# Altium PCB LiPoBattery.PcbDoc
Units mil, origin at the board's own origin, x right, y up, seen from the top; angles counter-clockwise.
Board outline 940 x 905 mil, 2 copper layers (Top Layer, Bottom Layer); 16 components, 13 nets, 65 pads, 8 vias.
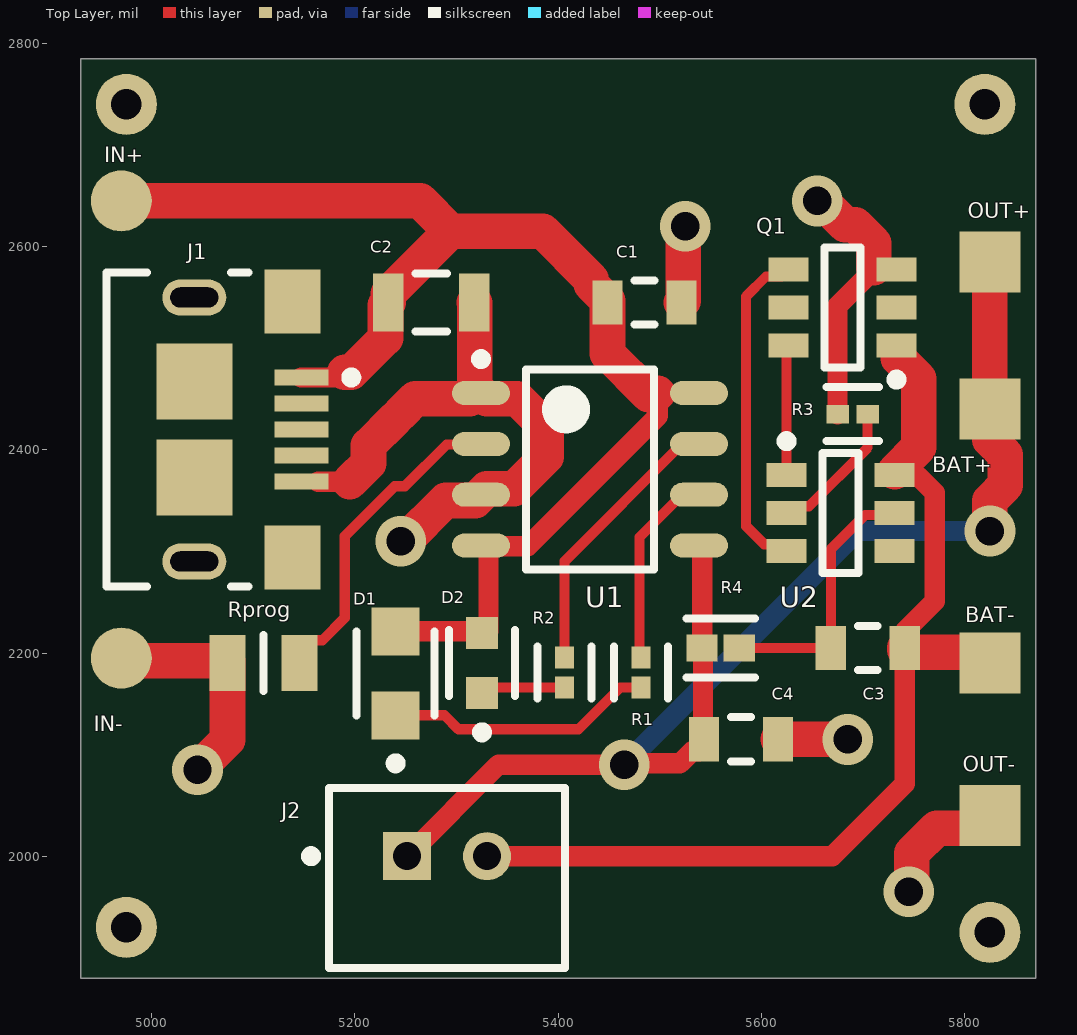
[diagram p0: Top Layer view]
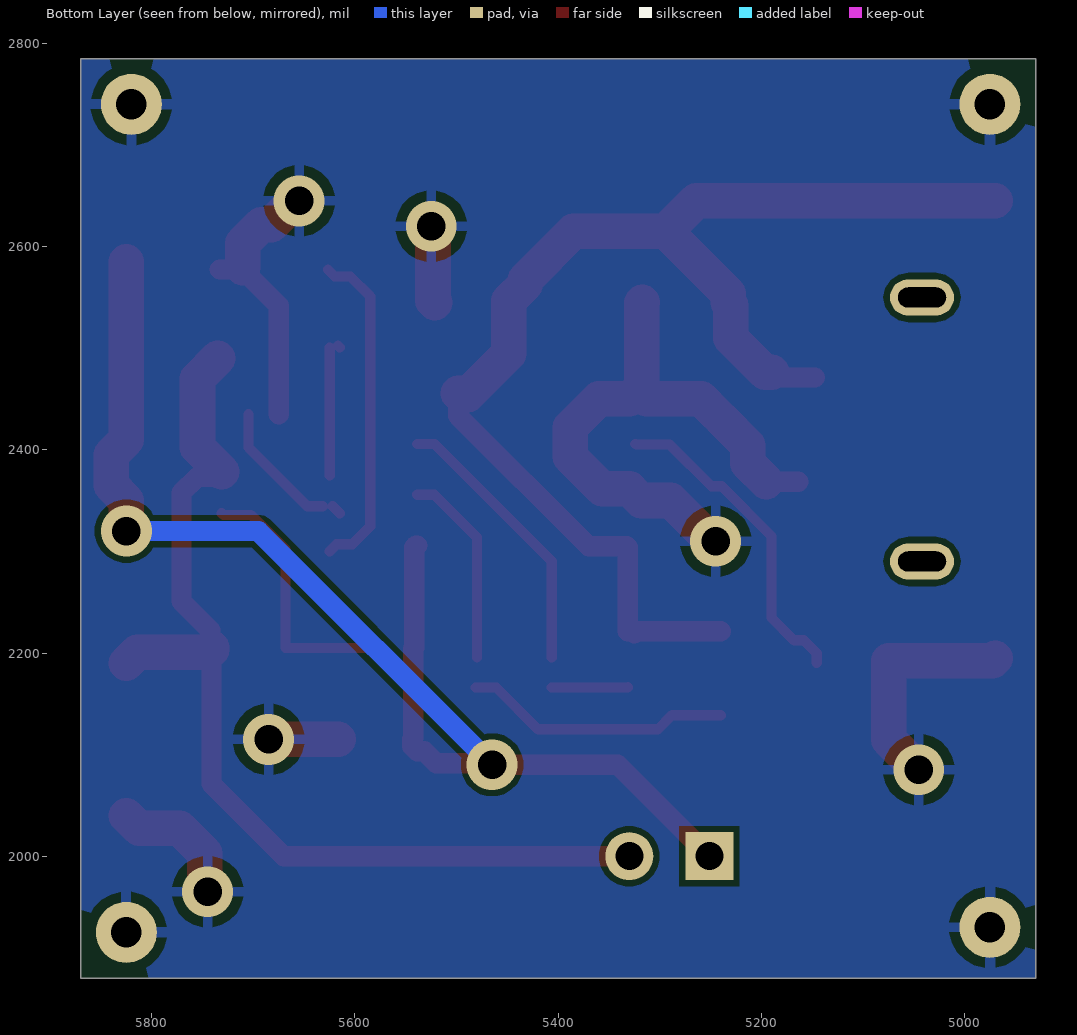
[diagram p1: Bottom Layer view, seen from below]
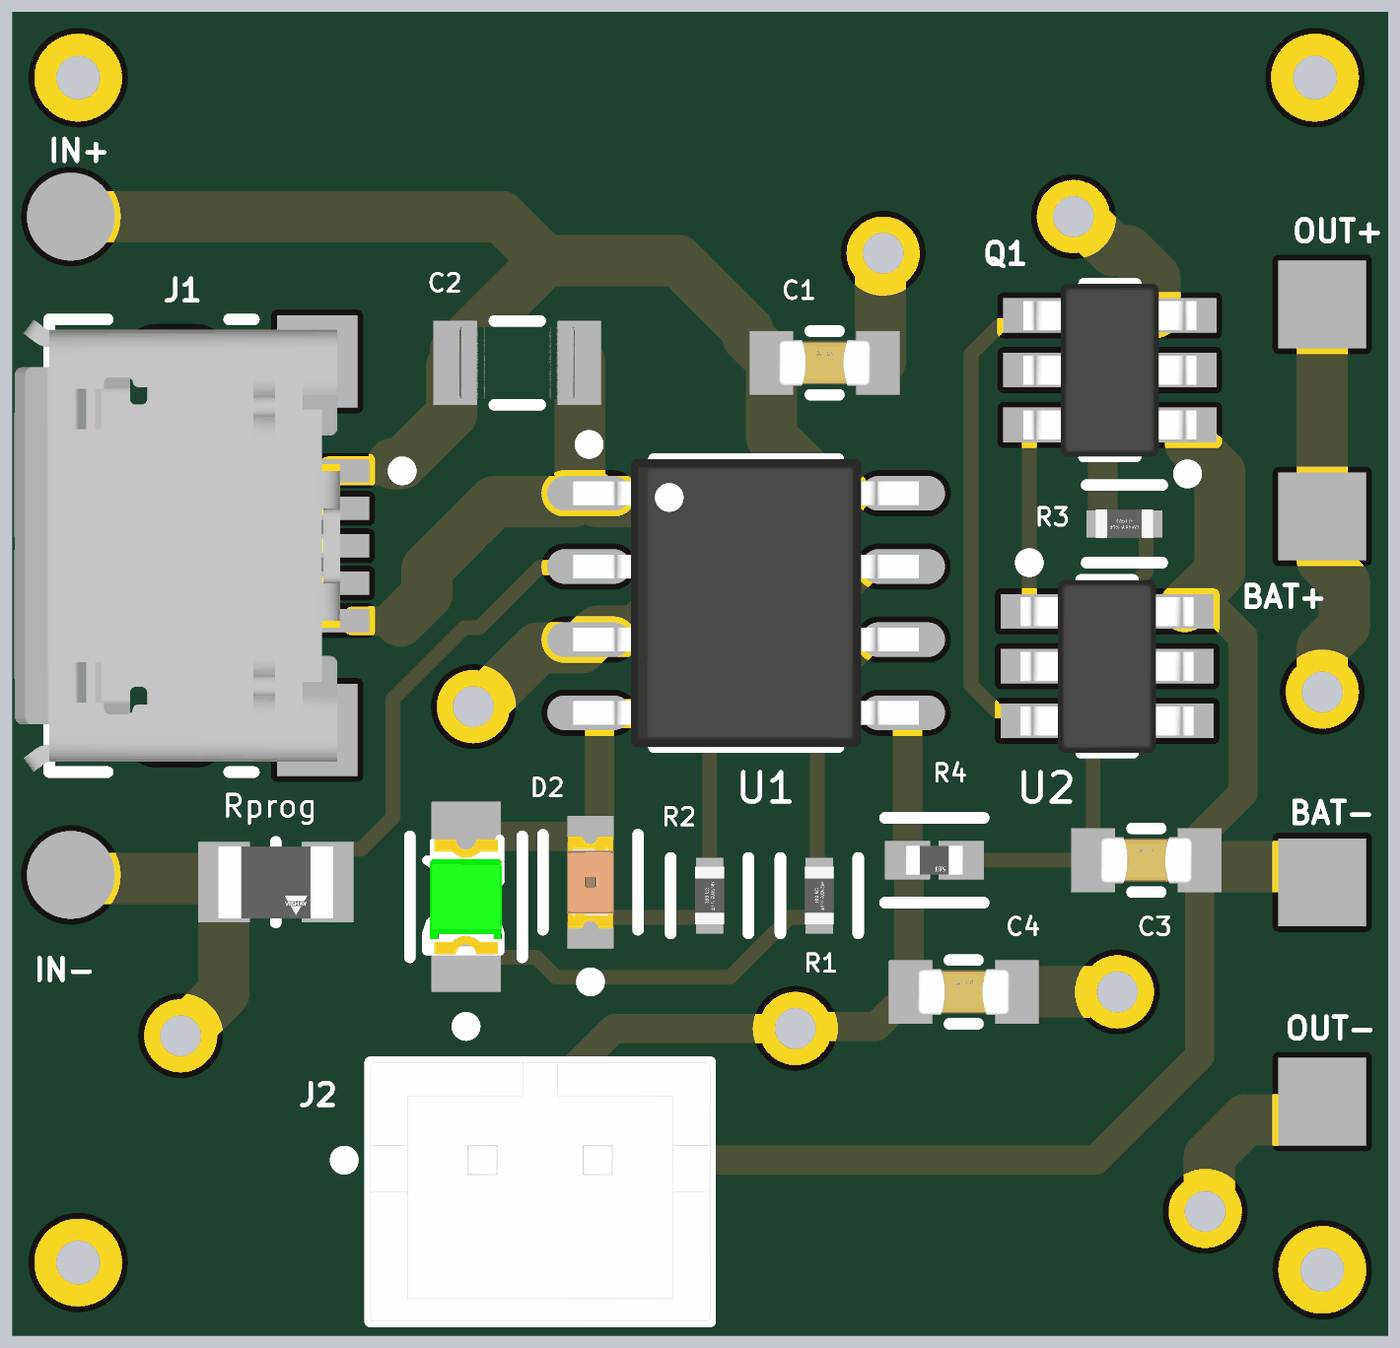
[diagram p2: 3D render of the assembled board from above, using the file's embedded part models]

## Layer stack, top to bottom
Top Solder: solder mask 0.4, Solder Resist, Dk 3.5
Top Layer: signal copper 1.4
Dielectric 1: dielectric 12.6, FR-4, Dk 4.8
Bottom Layer: signal copper 1.4
Bottom Solder: solder mask 0.4, Solder Resist, Dk 3.5

## Board outline
4930,2785 5870,2785 5870,1880 4930,1880

## Design rules (kind name [scope] priority, off if disabled: settings)
Clearance [All] p1: gap=6 ignorepadtopadclearanceinfootprint=TRUE
MinimumSolderMaskSliver [All] p1: minsoldermaskwidth=1.5
PolygonConnect [All] p1: connectstyle=Relief reliefconductorwidth=10 reliefentries=4 polygonreliefangle="90 Angle" airgapwidth=10
RoutingVias [All] p1: holewidth=28 width=50 viastyle="Through Hole" minholewidth=28 minwidth=50 maxholewidth=28 maxwidth=50
SilkToSolderMaskClearance [IsPad] p1: minsilkscreentomaskgap=6 clearancetoexposedcopper=TRUE
SolderMaskExpansion [All] p1: expansion=4 istentingtop=FALSE
SupplyNets "Schematic Supply Nets_1" [InNet('IN-')] p1: voltage=0.000
Width Width_Power [InNetClass('Power')] p1: maxlimit=40 minlimit=20 preferedwidth=35
Width Width_Regular [All] p2: maxlimit=10 minlimit=10 preferedwidth=10
28 further rules are at their usual default settings.

## Classes and differential pairs
net class Power: BAT+ BAT- IN+ IN-

## Components (designator, comment, footprint, x,y, rotation, side; value= is the part's Value field where it differs from the comment)
C1 "100nF" FP-CGA3E-0_3-0_1-IPC_B 5485,2545 r0 top
C2 "10uF" FP-CGA4J-IPC_B 5275,2545 r0 top
C3 "100nF" FP-CGA3E-0_3-0_1-IPC_B 5704.81,2205 r0 top
C4 "100nF" FP-CGA3E-0_3-0_1-IPC_B 5580,2115 r0 top
D1 "GREEN" FP-APHCM2012CGCK-F01-MFG 5240,2180 r90 top
D2 "RED" FP-LTST-C190KRKT-MFG 5325,2190 r90 top
J1 "Micro USB" FCI-10118193-0001LF-5_V 5095,2420 r270 top
J2 "Battery Header" FP-B2B-PH-K_LF_SN-MFG 5290.63,1978.35 r180 top
Q1 "FS8205" SOT95P280X145-6N 5679.81,2540 r180 top
R1 "1k" FP-CRGCQ0402-IPC_C 5481.36,2180.81 r90 top value=1KΩ
R2 "1k" FP-CRGCQ0402-IPC_C 5406.36,2180.81 r90 top value=1KΩ
R3 "1k" FP-CRGCQ0402-IPC_C 5689.81,2435 r0 top value=1KΩ
R4 "1k" FP-RNCP0402-IPC_A 5560,2205 r180 top
Rprog "1.2k" FP-MCU0805-MFG 5110,2190 r0 top
U1 "TP4056" SOIC127P600X265-8N 5431.36,2380.81 r0 top
U2 "DW01A" SOT95P280X145-6N 5677.96,2337.6 r0 top

## Footprints (in the part's own frame and the unit in brackets; to place one, negate y for a bottom-side part, rotate by r counter-clockwise, add the part's x,y. Pads: shape width x height; smd on the part's side, far side on the other; paste and mask are expansions set on the pad)
FCI-10118193-0001LF-5_V [mm] "Micro, USB-B, 5-Leads, Body 7.86x5.05mm, Pitch 0.65 mm"
  rect 0.4x1.35 smd: 1(-1.3,1.325) 2(-0.65,1.325) 3(0,1.325) 4(0.65,1.325) 5(1.3,1.325)
  rect 1.6x1.4 smd: 6(-3.2,1.1) 7(3.2,1.1)
  rect 1.9x1.9 smd: 8(-1.2,-1.35) 9(1.2,-1.35)
  oval 0.9x1.6 hole 0.5 slot 1.2 at 90 deg: 10(-3.3,-1.35) 11(3.3,-1.35)
  silkscreen extent -3.93,-3.55 3.93,2.7, body extent -3.93,-4.16 3.93,1.5, height 2.83
FP-APHCM2012CGCK-F01-MFG [mm]
  rect 1.2x1.2 smd paste+0 mask+0: 1(-1.05,0) 2(1.05,0)
  silkscreen extent -2.37,-0.97 1.05,0.97, body extent -1.75,-0.77 1.75,0.77, height 0.25
FP-B2B-PH-K_LF_SN-MFG [mm]
  rect 1.2x1.2 hole 0.7 paste-2539.97 mask+0: 1(1,-0.55)
  round 1.2 hole 0.7 paste-2539.97 mask+0: 2(-1,-0.55)
  silkscreen extent -2.95,-2.25 3.52,2.25, body extent -3.05,-2.35 3.05,2.35, height 0.25
FP-CGA3E-0_3-0_1-IPC_B [mm]
  rect 0.756x1.106 smd paste+0 mask+0: 1(-0.925,0) 2(0.925,0)
  silkscreen extent -0.25,-0.55 0.25,0.55, body extent -1.55,-0.8 1.55,0.8, height 0.25
FP-CGA4J-IPC_B [mm]
  rect 0.756x1.456 smd paste+0 mask+0: 1(-1.075,0) 2(1.075,0)
  silkscreen extent -0.4,-0.73 0.4,0.73, body extent -1.7,-0.98 1.7,0.98, height 0.25
FP-CRGCQ0402-IPC_C [mil]
  rect 22.03x18.6 smd paste+0 mask+0: 1(-14.81,0) 2(14.81,0)
  silkscreen extent -26,-27 26,27, body extent -30,-15 30,15, height 10
FP-LTST-C190KRKT-MFG [mm]
  rect 0.8x0.8 smd paste+0 mask+0: 1(-0.75,0) 2(0.75,0)
  silkscreen extent -1.85,-0.82 0.82,0.82, body extent -1.25,-0.55 1.25,0.55, height 0.25
FP-MCU0805-MFG [mm]
  rect 0.9x1.4 smd paste+0 mask+0: 1(-0.9,0) 2(0.9,0)
  silkscreen extent 0,-0.7 0,0.7, body extent -1.45,-0.8 1.45,0.8, height 0.25
FP-RNCP0402-IPC_A [mil]
  rect 30.75x26.48 smd paste+0 mask+0: 1(-18.33,0) 2(18.33,0)
  silkscreen extent -34,-29 34,29, body extent -42,-21 42,21, height 10
SOIC127P600X265-8N [mm] "SOIC, 8-Leads, Body 4,90x3,90mm, Pitch 1,27mm, IPC Medium Density"
  oval 1.45x0.6 smd: 1(-2.725,1.905) 2(-2.725,0.635) 3(-2.725,-0.635) 4(-2.725,-1.905) 5(2.725,-1.905) 6(2.725,-0.635) 7(2.725,0.635) 8(2.725,1.905)
  silkscreen extent -2.85,-2.5 1.6,2.88, body extent -3,-2.5 3,2.5, height 2.65
SOT95P280X145-6N [mm] "SOT23, 6-Leads, Body 2,90x2,80mm, Pitch 0,95mm, IPC Medium Density"
  rect 1x0.6 smd: 1(-1.35,0.95) 2(-1.35,0) 3(-1.35,-0.95) 4(1.35,-0.95) 5(1.35,0) 6(1.35,0.95)
  silkscreen extent -1.48,-1.5 0.45,1.92, body extent -1.5,-1.5 1.5,1.5, height 1.45

## Part data
C1 C3 C4: library part CMP-08246-001006-1, "Cap Ceramic 100nF 25V X8R 20% Pad SMD 0603 +150°C Automotive T/R", Case Code (Imperial)=0603, Case Code (Metric)=1608, Dielectric=X8R, Max Operating Temperature=150°C, Min Operating Temperature=-55°C, Package Quantity=4000, Ratings=AEC-Q200, Tolerance=20%, Voltage Rating=25V, Capacitance=100nF, Case/Package=0603, Features="High Temperature", Height=0.8mm, Length=0.063inch, Mount="Surface Mount", Packaging="Tape and Reel", Thickness=0.035inch, Voltage Rating (DC)=25V, Weight=7.1E-05oz, Width=0.031inch
C2: library part CMP-08246-002209-1, "Cap Ceramic 10uF 10V X5R 20% Pad SMD 0805 +85°C Automotive T/R", Case Code (Imperial)=0805, Case Code (Metric)=2012, Max Operating Temperature=85°C, Min Operating Temperature=-55°C, Package Quantity=2000, Ratings=AEC-Q200, Tolerance=20%, Voltage Rating=10V, Capacitance=10uF, Case/Package=0805, Length=0.079inch, Mount="Surface Mount", Packaging="Tape and Reel", Thickness=0.057inch, Width=0.049inch
D1: library part CMP-44529-000062-1, "LED GREEN CLEAR CHIP SMD", Case Code (Imperial)=0805, Case Code (Metric)=2012, Color=Green, Forward Current=20mA, Forward Voltage=2.1V, Lens Color=Clear, Max Operating Temperature=85°C, Min Operating Temperature=-40°C, Package Quantity=1, Case/Package=0805, Dominant Wavelength=570nm, Height=0.4mm, Illumination Color=Green, Lead Free="Lead Free", Length=2mm, Lens Style=Clear, Luminous Intensity=40mcd, Mount="Surface Mount", Number of LEDs=1, Number of Pins=2, Packaging="Tape and Reel", RoHS Compliant=Yes, Series=APHCM, Test Current=20mA, Viewing Angle=110°, Wavelength=570nm, Width=1.25mm
D2: library part CMP-1674-00011-2, "LED RED CLEAR CHIP SMD", Case Code (Imperial)=0603, Case Code (Metric)=1608, Color=Red, Forward Current=30mA, Forward Voltage=2.4V, Lens Color=Colorless, Max Operating Temperature=85°C, Min Operating Temperature=-55°C, Package Quantity=1, Power Dissipation=75mW, Reverse Voltage=5V, Test Current=20mA, Case/Package=0603, Depth=0.8mm, Dominant Wavelength=631nm, Height=0.8mm, Illumination Color=Red, Lead Free="Lead Free", Length=1.6mm, Lens Style=Diffused, Lens Transparency=Clear, Luminous Intensity=54mcd, Mount="Surface Mount", Number of Elements=1, Number of LEDs=1, Number of Pins=2, Packaging="Tape and Reel", Power Rating=75mW, Radiation Hardening=No, Viewing Angle=130°, Wavelength=639nm, Width=0.8mm
J1: library part CMP-2000-05119-1, "Micro USB B Type Receptacle, -55 to 85 degC, 5-Pin SMD, RoHS, Tape and Reel", Color=Black, Current Rating=1.8A, Flammability Rating=UL94V-0, Insulation Resistance=1000MOhms, Manufacturer=FCI, Operating Temperature Range=-55Cto+85C, Brand=FCI, Connector Type=MicroUSBTypeBreceptacle, Contact Material=CopperAlloy, Contact Plating=Gold, Datasheet URL=http://datasheet.octopart.com/10118193-0001LF-FCI-datasheet-55953155.pdf, Datasheet Version="Rev. C, 05/2015", Factory Pack Quantity=1200, Gender=Female, Manufacturer URL=http://www.fci.com/, Mounting Angle=Right, Number of Contacts=5Contact, Packaging=Reel, Product=MicroUSBTypeBConnectors, Product Category=USBConnectors, RoHS=Details, Standard=USB2.0, Termination Style=SMD/SMT
J2: library part CMP-17439-000674-1, "Connector Header Through Hole 2 position 0.079\" (2.00mm)", Color=Beige, Current Rating=2A, Insulation Resistance=1GR, Max Operating Temperature=85°C, Min Operating Temperature=-25°C, Voltage Rating=100V, Contact Material=Brass, Contact Plating=Tin, Gender=Male, Lead Free="Lead Free", Material=Polyamide, Mount="Through Hole", Number of Positions=2, Number of Rows=1, Pitch=2mm, Termination=Crimp
R1 R2 R3: library part CMP-03211-006314-1, "CRGCQ0402 1KΩ 1% ±100ppm/°C 50V", Ambient Temperature Range High=+70°C, Manufacturer="TE Connectivity", Manufacturer Part Number=CRGCQ0402F1K0, Package=CRGCQ0402, Power Rating=0.0625W, Resistance=1KΩ, Temperature="-55°C to +155°C", Temperature Coefficient=±100ppm/°C, Temperature Range High=+155°C, Temperature Range Low=-55°C, Tolerance=0.01, Voltage Rating=50V, Automotive=Yes, Category=Res, ComponentLink2Description=Datasheet, ComponentLink2URL=https://www.te.com/commerce/DocumentDelivery/DDEController?Action=showdoc&DocId=Data+Sheet%7F1773204-3%7F1%7Fpdf%7FEnglish%7FENG_DS_1773204-3_1.pdf%7F4-2176347-694, Composition="Thick Film", Device Class L1="Passive Components", Device Class L2=Resistors, Device Class L3="Chip SMD Resistors", Height=0.4mm, Ipc Land Pattern Name=RESC10050X35, Lead Free=Yes, Octopart=https://octopart.com/crgcq0402f1k0-te+connectivity-91017946, RoHS=TRUE, Series=CRGCQ
R4: library part CMP-26527-007295-1, "100Ω ±1% 0.1W 0402 High Power Anti-Sulfur Thin Film Chip Resistor", Case/Package=0402, Max Operating Temperature=155°C, Max Power Dissipation=100mW, Min Operating Temperature=-55°C, Resistance=100R, Resistor Type="Thin Film", Temperature Coefficient=100ppm/°C, Tolerance=1%, Features="Moisture Resistant", Mount="Surface Mount", Number of Terminations=2, Packaging="Tape and Reel", RoHS Compliant=Yes
Rprog: library part CMP-02407-012109-1, "RES 1.05K OHM 0.5% 1/5W 0805", Case/Package=0805, Max Operating Temperature=155°C, Max Power Dissipation=200mW, Min Operating Temperature=-55°C, Package Quantity=5000, Resistance=1.2kR, Resistor Type="Thin Film", Temperature Coefficient=50ppm/°C, Tolerance=1%, Contact Plating=Tin, Height=0.022inch, Lead Free="Lead Free", Length=0.079inch, Number of Terminations=2, Packaging="Tape and Reel", Radiation Hardening=No, RoHS Compliant=Yes, Series="MCU 0805 - Professional", Width=0.049inch
U1: "SOP-8 Battery Management ICs ROHS", Manufacturer Part Number=TP4056
U2: "battery protection IC", Manufacturer Part Number=DW01A
Q1: Manufacturer Part Number=FS8205

## Free pads (board coordinates)
  round 60 smd: 3(4970,2645) 4(4970,2195)
  rect 60x60 smd: 5(5825,2585) 6(5825,2440) 7(5825,2190) 8(5825,2040)
  round 60 hole 30: 9(4975,2740) 10(4975,1930) 11(5825,1925) 12(5820,2740)

## Via types
v1: diameter 50, hole 28, Top Layer to Bottom Layer, 8 vias

## Nets (pads, with @x,y where several pads share a name; then routed paths per layer and width w, separated by ;. In a path a pad name is that pad's centre, name@x,y a point inside that pad or via, vN(x,y) a via of type N, cw(c..) or ccw(c..) an arc to the next point about the centre after c; other vN are vias at no path point)
BAT+: C4.1 J2.1 pad.5 pad.6 R4.2 U1.5 | length 1270.3
  Top Layer w20: J2.1 5341.26,2090 v1(5465,2090) 5466.42,2091.42 5520,2091.42 5531.81,2103.22 5538.7,2103.22 5543.58,2108.11 C4.1 5542.63,2115.96 5542.63,2204.04 R4.2 5541.67,2304.14 5540,2305.81 U1.5
  Top Layer w35: v1(5825,2320) 5825,2350 5840,2365 5840,2395 5825,2410 pad.6 pad.5
  Bottom Layer w20: v1(5465,2090) 5695,2320 v1(5825,2320)
BAT-: C3.2 J2.2 pad.7 Q1.1 U2.6 | length 989.3
  Top Layer w20: J2.2 5670,2000 5741.23,2071.23 C3.2 ; U2.6 5732.92,2373.19 5755.3,2373.19 5770.8,2357.69 5770.8,2250.8 C3.2@5742.24,2222.24
  Top Layer w35: U2.6@5731.11,2378.5 5755,2402.39 5755,2470 5735,2490 ; C3.2 5741.23,2203.34 5743.84,2200.72 5814.28,2200.72 pad.7
IN+: C1.1 C2.1 D1.2 D2.2 J1.1 pad.3 U1.4 U1.8 | length 1275.4
  Top Layer w20: J1.1 5185,2471.18 ; D1.2 5323.19,2221.34 D2.2 ; D2.2@5331.36,2221.34 5331.36,2304.14 5332.34,2305.12 5369.88,2305.12 5370,2305 5498.19,2433.19 5498.19,2455.81
  Top Layer w35: pad.3 5264.13,2645 5294.13,2615 ; 5189.96,2476.14 5196.14,2476.14 5230.06,2510.06 5230.06,2542.39 C2.1 5232.68,2553.55 5294.13,2615 ; 5489.19,2454.19 5448.58,2494.79 C1.1 5448.58,2546.66 5432.5,2562.74 5432.5,2567.5 5385,2615 5294.13,2615 ; 5489.19,2455.81 5498.19,2455.81
IN-: C1.2 C2.2 C4.2 J1.5 pad.4 pad.8 pad.9 pad.10 pad.11 pad.12 Q1.3 R3.1 Rprog.1 U1.1 U1.3 | length 1335.7
  Top Layer w20: J1.5@5163.74,2368.57 5195,2368.57 ; R3.1 5675,2541.82 5710.58,2577.4 ; 5710.58,2579.31 5710.58,2577.4 ; Q1.3 5710.58,2577.4
  Top Layer w35: pad.4 4972.5,2192.5 5074.35,2192.5 5074.57,2192.28 Rprog.1 5074.57,2114.57 v1(5045,2085) ; 5195,2368.57 5213.31,2386.88 5213.31,2404.25 5240,2430.94 ; 5244.06,2435 5259.18,2450.12 U1.1@5313.04,2450.12 ; v1(5245,2310) 5249.06,2310 5289.18,2350.12 5318.39,2350.12 5329.77,2361.5 5356.5,2361.5 5388,2393 5388,2422 5359.88,2450.12 5329.77,2450.12 U1.1 ; C2.2 5317.83,2544.49 U1.1@5317.83,2461.5 ; C1.2 5523.21,2546.79 5523.21,2618.21 v1(5525,2620) ; C4.2 v1(5685,2115) ; v1(5655,2645) 5659.06,2645 5682.46,2621.6 5692.28,2621.6 5710.58,2603.29 5710.58,2579.31 ; v1(5745,1965) 5747.87,1967.87 5747.87,2002.87 5772.5,2027.5 5812.5,2027.5 pad.8
NetC3_1: C3.1 R4.1 U2.5 | length 264.6
  Top Layer w10: R4.1 C3.1 5668.4,2302.09 5702.28,2335.98 5729.5,2335.98 U2.5
NetD1_1: D1.1 R1.1 | length 264
  Top Layer w10: D1.1 5288.11,2138.66 5301.77,2125 5420,2125 5461,2166 R1.1
NetD2_1: D2.1 R2.1 | length 75.1
  Top Layer w10: D2.1@5331.36,2166.28 5331.65,2166 R2.1
NetQ1_4: Q1.4 U2.3 | length 328.9
  Top Layer w10: U2.3 5618,2307.01 5602.69,2307.01 5585,2324.7 5585,2551.05 5604.54,2570.59 5619.85,2570.59 Q1.4
NetQ1_6: Q1.6 U2.1 | length 128.4
  Top Layer w10: Q1.6@5615,2500.75 Q1.6@5616.85,2502.6 ; U2.1 Q1.6@5624.81,2500.75
NetR1_2: R1.2 U1.6 | length 194.3
  Top Layer w10: R1.2@5480,2195.59 5480,2313.9 5521.91,2355.81 U1.6
NetR2_2: R2.2 U1.7 | length 274.8
  Top Layer w10: R2.2 5406.36,2290.26 5521.91,2405.81 U1.7
NetR3_2: R3.2 U2.2 | length 139.4
  Top Layer w10: U2.2@5615,2337.6 U2.2@5621.81,2344.41 ; U2.2@5631.62,2344.41 5646.93,2344.41 5704.63,2402.1 R3.2
NetRprog_2: Rprog.2 U1.2 | length 320.9
  Top Layer w10: Rprog.2 5145.43,2199.84 5158.15,2212.56 5167.99,2212.56 5190,2234.57 5190,2315 5239.06,2364.06 5249.06,2364.06 5290.12,2405.12 5323.39,2405.12 U1.2
pads on no net: J1.2 J1.3 J1.4 J1.6 J1.7 J1.8 J1.9 J1.10 J1.11 Q1.2 Q1.5 U2.4

## Polygon pours and split planes (outlines as drawn)
IN- on Bottom Layer "IN-_L02_P003" (solid, pour order 3): 4930,2785 5870,2785 5870,1880 4930,1880
IN- on Bottom Layer "IN-_L02_P000" (solid, pour order 0): 4930,2710 5800,2710 5800,1880 4930,1880
IN- on Bottom Layer "IN-_L02_P002" (solid, pour order 2): 4930,2785 4930,2710 5870,2710 5870,2785

## Silkscreen, mask and mechanical layers (free items; w line width, h text height)
Top Overlay:
  text "IN+" at 4953,2683 h15
  text "OUT+" at 5803,2628 h15
  text "BAT+" at 5768,2378 h15
  text "BAT-" at 5800.49,2230.34 h15
  text "IN-" at 4943,2123 h15
  text "OUT-" at 5798,2083 h15